# EAGLE board mach hoan chinh (EAGLE 5.10)
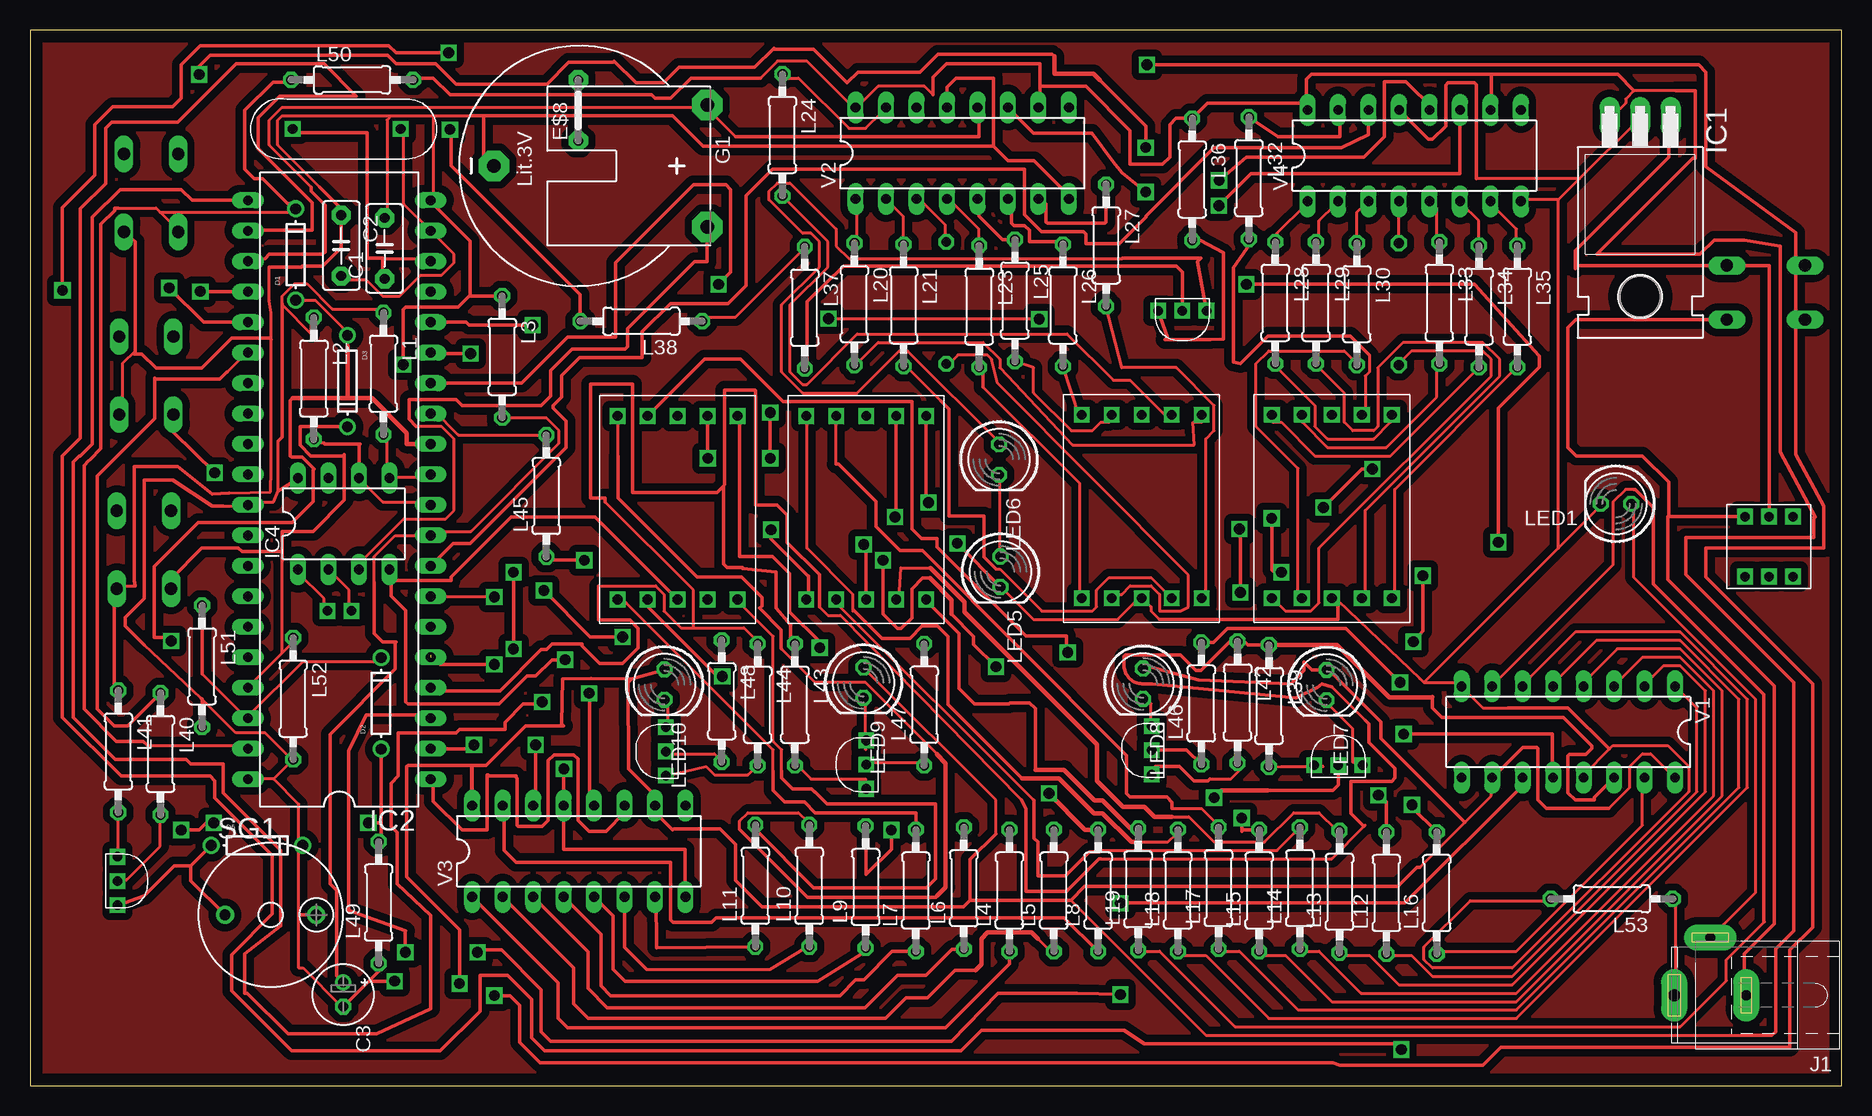
[diagram p0: board, top side]
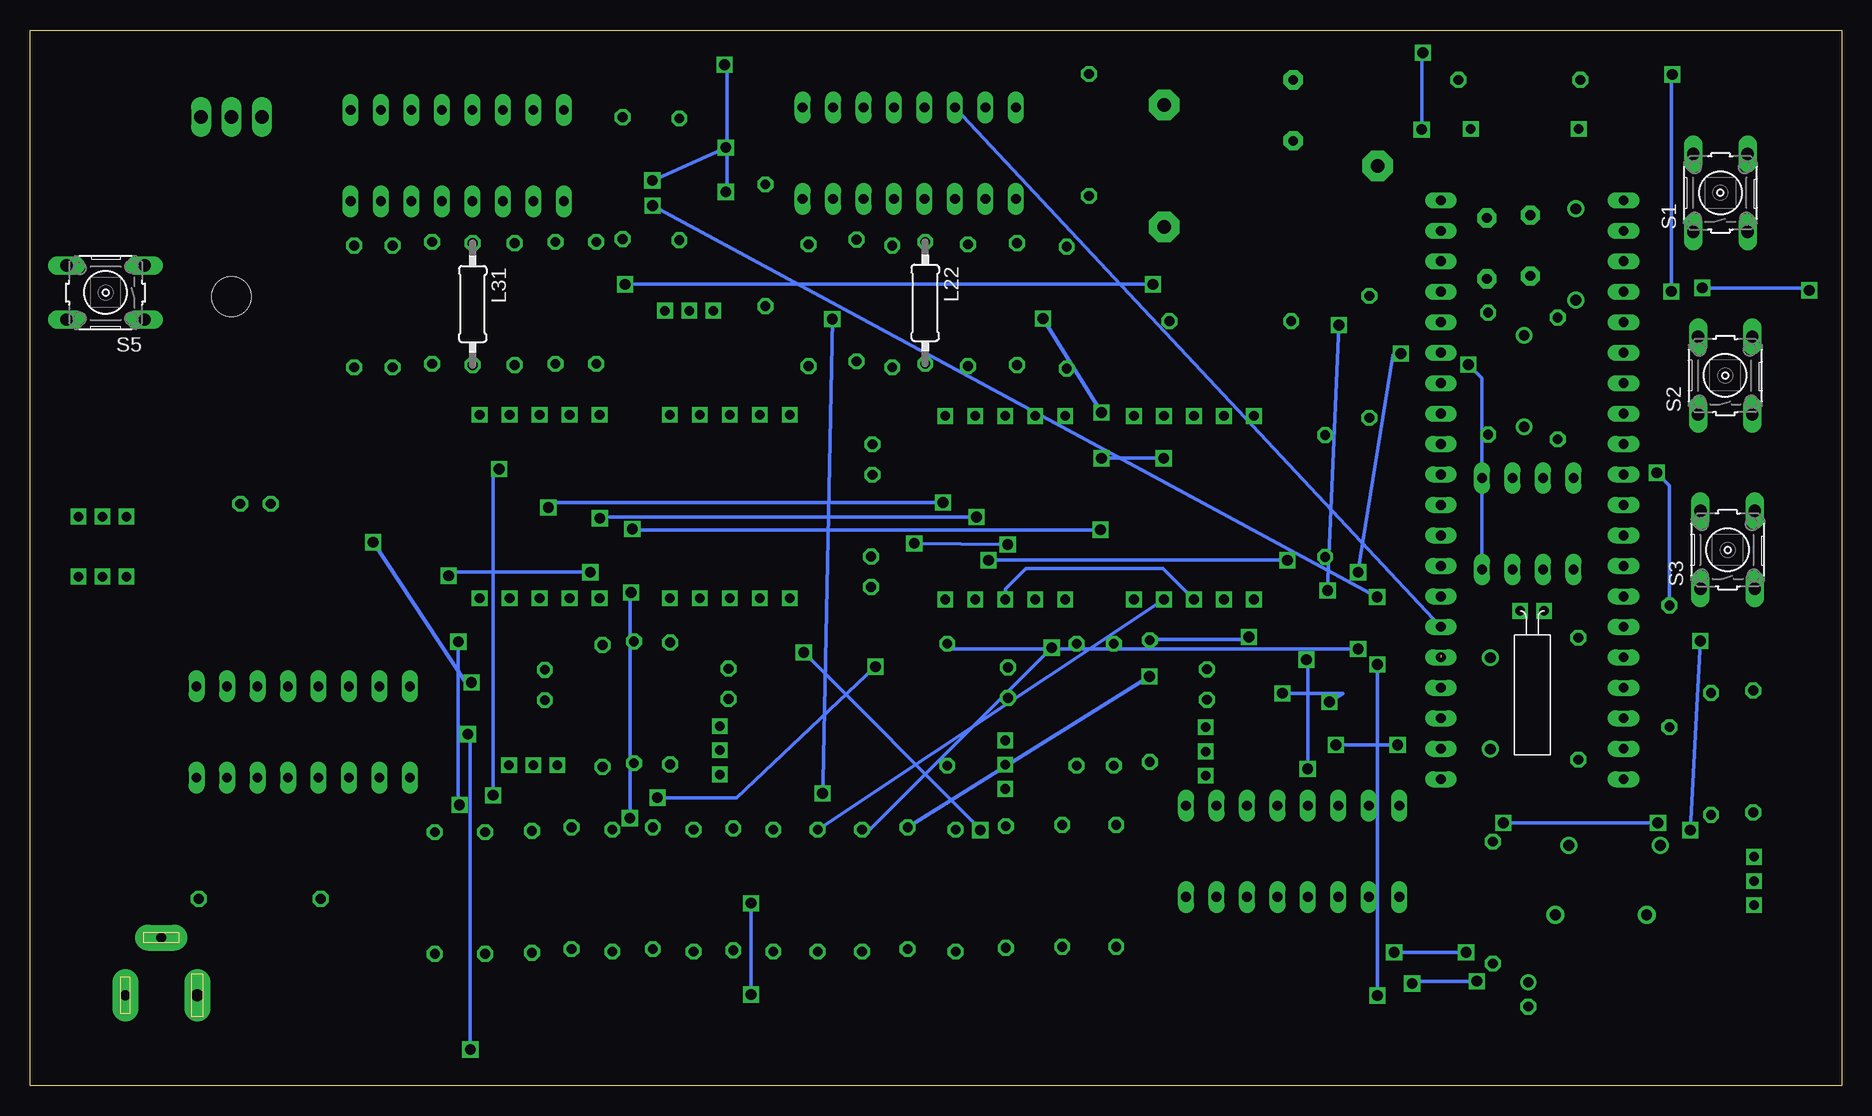
[diagram p1: board, bottom side, seen from below]

Size 151 x 88 mm. Coordinates in mm from the lower left corner, seen from the top.
Outline: 0,0 151,0 151,88 0,88 0,0
Copper layers (1*16): Top 0.035mm / dielectric 1.5mm / Bottom 0.035mm
Design rules "default": minimum track width 10mil, minimum drill 24mil, track to track 8mil, track to pad 8mil, pad to pad 8mil, via to via 8mil, smd to smd 8mil, copper to edge 40mil, drill to drill 8mil, minimum pad ring 10mil, minimum via ring 8mil, stop-mask expansion 4mil, vias tented up to drill 0mil, thermal gap 10mil

## Footprints (pad centres in the part's own frame; a part is rotated, then mirrored left to right if it is on the bottom)
C5B3 = drill 0.813 pad 1.6 octagon: 1 -2.54,0; 2 2.54,0
E2-5 = drill 0.813 pad 1.27 round: + -1.016,0 | drill 0.813 pad 1.27 octagon: - 1.016,0
DO-1N4148 = drill 0.9 round: A -3.81,0; C 3.81,0
05 = drill 0.813 pad 1.6 octagon: 1 -2.54,0; 2 2.54,0
CR2032H = drill 1.118 pad 2.54 octagon: + 5.08,10.795; +@1 -5.08,10.795; - 0,-6.985
TO220H = drill 1.118 long: 1 -2.54,-10.16; 2 0,-10.16; 3 2.54,-10.16 | hole 3.302: 0,4.826
DIL40 = drill 0.813 long: 1 -24.13,-7.62; 2 -21.59,-7.62; 3 -19.05,-7.62; 4 -16.51,-7.62; 5 -13.97,-7.62; 6 -11.43,-7.62; 7 -8.89,-7.62; 8 -6.35,-7.62; 9 -3.81,-7.62; 10 -1.27,-7.62; 11 1.27,-7.62; 12 3.81,-7.62; 13 6.35,-7.62; 14 8.89,-7.62; 15 11.43,-7.62; 16 13.97,-7.62; 17 16.51,-7.62; 18 19.05,-7.62; 19 21.59,-7.62; 20 24.13,-7.62; 21 24.13,7.62; 22 21.59,7.62; 23 19.05,7.62; 24 16.51,7.62; 25 13.97,7.62; 26 11.43,7.62; 27 8.89,7.62; 28 6.35,7.62; 29 3.81,7.62; 30 1.27,7.62; 31 -1.27,7.62; 32 -3.81,7.62; 33 -6.35,7.62; 34 -8.89,7.62; 35 -11.43,7.62; 36 -13.97,7.62; 37 -16.51,7.62; 38 -19.05,7.62; 39 -21.59,7.62; 40 -24.13,7.62
DIL08 = drill 0.813 long: 1 -3.81,-3.81; 2 -1.27,-3.81; 3 1.27,-3.81; 4 3.81,-3.81; 5 3.81,3.81; 6 1.27,3.81; 7 -1.27,3.81; 8 -3.81,3.81
SPC4077 = drill 0.8 pad 2.184 long: 1 -3,0; 2 0,-4.8 | drill 1 pad 2.184 long: 3 3,0
0207/10 = drill 0.813 octagon: 1 -5.08,0; 2 5.08,0
LED5MM = drill 0.813 octagon: A -1.27,0; K 1.27,0
B3F-10XX = drill 1.016 long: 1 -3.251,2.261; 2 3.251,2.261; 3 -3.251,-2.261; 4 3.251,-2.261
BMT1205XH7.5 = drill 0.9 pad 1.5 round: + 3.8,0; - -3.8,0
7SEG13X19 = drill 0.8 square: P$1 11.5,-1.7; P$2 9,-1.7; P$3 6.5,-1.7; P$4 4,-1.7; P$5 1.5,-1.7; P$6 11.5,-17; P$7 9,-17; P$8 6.5,-17; P$9 4,-17; P$10 1.5,-17
XTAL12MHZ = drill 0.8 square: P$1 9.5,-2.5; P$2 0.5,-2.5
XTAL32KHZMINI = drill 0.8 square: P$1 0.5,-12; P$2 2.5,-12
PUSKLOCKBUTTON = drill 0.8 square: P$1 5.04,0; P$2 3.04,0; P$3 1.04,0; P$4 1.04,-5; P$5 3.04,-5; P$6 5.04,-5
C9014 = drill 0.8 square: P$1 0.23,1; P$2 2.25,1; P$3 4.27,1
DIL16 = drill 0.813 long: 1 -8.89,-3.81; 2 -6.35,-3.81; 3 -3.81,-3.81; 4 -1.27,-3.81; 5 1.27,-3.81; 6 3.81,-3.81; 7 6.35,-3.81; 8 8.89,-3.81; 9 8.89,3.81; 10 6.35,3.81; 11 3.81,3.81; 12 1.27,3.81; 13 -1.27,3.81; 14 -3.81,3.81; 15 -6.35,3.81; 16 -8.89,3.81

## Placement (x,y rotation side)
C1  [C5B3]  29.56,69.79 90 top
C2  [C5B3]  25.94,70.03 270 top
C3  [E2-5]  26.11,7.59 270 top
D1  [DO-1N4148]  22.14,69.28 90 top
D2  [DO-1N4148]  29.26,31.86 90 top
D3  [DO-1N4148]  26.46,58.73 270 top
D5  [DO-1N4148]  18.92,20.02 0 top
E$8  [05]  45.7,81.3 90 top
G1  CR2032H  [CR2032H]  45.66,76.66 270 top
IC1  7805T  [TO220H]  134.21,70.6 180 top
IC2  AT89C51-12PC  [DIL40]  25.78,49.67 90 top
IC4  ds1307  [DIL08]  26.15,46.83 0 top
J1  [SPC4077]  140.06,7.52 180 top
L1  [0207/10]  29.46,59.35 270 top
L2  [0207/10]  23.66,58.95 270 top
L3  [0207/10]  39.36,60.75 270 top
L4  [0207/10]  81.64,16.25 90 top
L5  [0207/10]  85.34,16.25 90 top
L6  [0207/10]  77.84,16.45 90 top
L7  [0207/10]  73.84,16.25 90 top
L8  [0207/10]  89.04,16.25 90 top
L9  [0207/10]  69.66,16.55 90 top
L10  [0207/10]  64.96,16.65 90 top
L11  [0207/10]  60.46,16.65 90 top
L12  [0207/10]  113.06,16.05 90 top
L13  [0207/10]  109.16,16.15 90 top
L14  [0207/10]  105.86,16.45 90 top
L15  [0207/10]  102.46,16.25 90 top
L16  [0207/10]  117.26,16.05 90 top
L17  [0207/10]  99.08,16.45 90 top
L18  [0207/10]  95.68,16.25 90 top
L19  [0207/10]  92.38,16.35 90 top
L20  [0207/10]  68.72,65.15 270 top
L21  [0207/10]  72.82,65.05 270 top
L22  [0207/10]  76.38,65.25 270 bottom
L23  [0207/10]  79.12,64.95 270 top
L24  [0207/10]  62.72,79.25 270 top
L25  [0207/10]  82.1,65.45 270 top
L26  [0207/10]  86.1,65.05 270 top
L27  [0207/10]  89.7,70.05 270 top
L28  [0207/10]  103.8,65.25 270 top
L29  [0207/10]  107.2,65.25 270 top
L30  [0207/10]  110.6,65.15 270 top
L31  [0207/10]  114.1,65.15 270 bottom
L32  [0207/10]  101.6,75.65 270 top
L33  [0207/10]  117.48,65.25 270 top
L34  [0207/10]  120.78,64.95 270 top
L35  [0207/10]  123.98,64.95 270 top
L36  [0207/10]  96.88,75.55 270 top
L37  [0207/10]  64.58,64.85 270 top
L38  [0207/10]  50.95,63.72 180 top
L39  [0207/10]  103.28,31.65 270 top
L40  [0207/10]  10.88,27.65 270 top
L41  [0207/10]  7.36,27.85 270 top
L42  [0207/10]  100.66,31.95 270 top
L43  [0207/10]  63.76,31.75 270 top
L44  [0207/10]  60.66,31.75 270 top
L45  [0207/10]  43.04,49.15 90 top
L46  [0207/10]  97.64,31.85 90 top
L47  [0207/10]  74.54,31.75 90 top
L48  [0207/10]  57.66,32.05 270 top
L49  [0207/10]  29.06,15.25 90 top
L50  [0207/10]  26.85,83.84 0 top
L51  [0207/10]  14.34,34.95 270 top
L52  [0207/10]  21.94,32.25 270 top
L53  [0207/10]  131.85,15.56 180 top
LED1  [LED5MM]  132.2,48.5 180 top
LED5  [LED5MM]  80.89,42.83 270 top
LED6  [LED5MM]  80.78,52.19 270 top
LED7  [LED5MM]  108.08,33.39 270 top
LED8  [LED5MM]  92.78,33.49 270 top
LED9  [LED5MM]  69.48,33.59 270 top
LED10  [LED5MM]  52.89,33.43 270 top
S1  [B3F-10XX]  10.09,74.42 90 bottom
S2  [B3F-10XX]  9.69,59.19 90 bottom
S3  [B3F-10XX]  9.49,44.66 90 bottom
S5  [B3F-10XX]  144.7,66.11 180 bottom
SG1  BMT1205XH7.5  [BMT1205XH7.5]  20.05,14.22 0 top
U$1  7SEG13X19  [7SEG13X19]  63.2,57.52 0 top
U$2  7SEG13X19  [7SEG13X19]  86.16,57.62 0 top
U$3  7SEG13X19  [7SEG13X19]  102.02,57.62 0 top
U$4  7SEG13X19  [7SEG13X19]  47.48,57.52 0 top
U$5  XTAL12MHZ  [XTAL12MHZ]  21.4,82.25 0 top
U$6  XTAL32KHZMINI  [XTAL32KHZMINI]  24.29,27.57 180 bottom
U$7  PUSHLOCKBUTON  [PUSKLOCKBUTTON]  141.92,47.43 0 top
U$8  C9014  [C9014]  6.3,19.3 270 top
U$9  C9014  [C9014]  94.5,25.7 90 top
U$10  C9014  [C9014]  106.8,25.7 0 top
U$11  C9014  [C9014]  70.7,24.5 90 top
U$12  C9014  [C9014]  54,25.6 90 top
U$13  C9014  [C9014]  98.3,65.6 180 top
V1  74595N  [DIL16]  128.23,29.47 180 top
V2  74595N  [DIL16]  77.71,77.73 0 top
V3  74595N  [DIL16]  45.75,19.53 0 top
V4  74595N  [DIL16]  115.39,77.53 0 top

## Library data of the parts
C1 C2 = capacitor-wima
C3 = rcl
D1-D3 D5 = microbuilder
E$8 = jumper
G1 = battery
IC1 = linear
IC2 = atmel
IC4 = ic-package
J1 = con-jack
L1-L53 = resistor
LED1 LED5-LED10 = led
S1-S3 S5 = switch-omron
SG1 = buzzer
U$1-U$4 = 7seg13x19
U$5 = xtal12mhz
U$6 = Xtal32khzmini
U$7 = pushlockbutton
U$8-U$13 = C9014
V1-V4 = 74ttl-din

## Nets
N$1: IC2.11 IC4.5 L1.2
N$2: IC2.10 IC4.6 L2.2
N$3: IC4.1 U$6.P$1
N$4: C3.+ IC2.9 L3.2
N$5: G1.+ IC4.3
N$6: IC4.2 U$6.P$2
N$7: C2.2 IC2.19 U$5.P$1
N$8: C1.1 IC2.18 U$5.P$2
N$9: D1.C IC2.39 L50.1 S1.1
N$10: IC2.25 L38.2
N$11: IC2.1 V3.11
N$12: IC2.2 V3.14
N$13: IC2.3 V1.11
N$14: IC2.4 L39.1 L42.1 L43.1 L44.1 V1.14
N$15: IC2.5 V2.11
N$16: L9.2 U$4.P$4
N$17: IC2.6 V2.14
N$18: IC2.7 V4.11
N$19: IC2.8 V4.14
N$20: L4.1 V3.1
N$21: L8.1 V3.15
N$22: L7.2 U$4.P$10
N$23: L9.1 V3.5
N$24: L10.1 V3.6
N$25: L4.2 U$4.P$1
N$26: L11.1 V3.7
N$27: L6.1 V3.3
N$28: L7.1 V3.4
N$29: L5.1 V3.2
N$32: L10.2 U$4.P$5
N$34: L11.2 U$4.P$6
N$35: L37.1 L38.1
N$36: L15.2 U$1.P$10
N$37: L13.1 V1.2
N$38: L14.1 V1.3
N$39: L15.1 V1.4
N$41: L17.1 V1.5
N$42: L18.2 U$1.P$5
N$43: L18.1 V1.6
N$44: L16.1 V1.15
N$45: L16.2 U$1.P$2
N$47: L13.2 U$1.P$7
N$48: L14.2 U$1.P$9
N$51: L19.2 U$1.P$6
N$52: J1.1 S5.1 U$7.P$3
N$53: L37.2 U$13.P$2
N$54: L23.2 U$2.P$10
N$55: L27.1 V2.7
N$56: L25.1 V2.5
N$57: L26.1 V2.6
N$58: L27.2 U$2.P$6
N$59: L23.1 V2.4
N$60: L21.1 V2.2
N$61: L20.1 V2.1
N$62: L24.1 V2.15
N$63: L24.2 U$2.P$2
N$64: L20.2 U$2.P$1
N$65: L21.2 U$2.P$7
N$66: L22.2 U$2.P$9
N$67: L25.2 U$2.P$4
N$68: L26.2 U$2.P$5
N$69: L22.1 V2.3
N$70: L31.2 U$3.P$10
N$71: L35.1 V4.7
N$72: L33.1 V4.5
N$73: L34.1 V4.6
N$74: L30.1 V4.3
N$75: L31.1 V4.4
N$76: L29.1 V4.2
N$77: L28.1 V4.1
N$78: L32.1 V4.15
N$79: L32.2 U$3.P$2
N$80: L28.2 U$3.P$1
N$81: L29.2 U$3.P$7
N$82: L30.2 U$3.P$9
N$83: L33.2 U$3.P$4
N$84: L34.2 U$3.P$5
N$85: L35.2 U$3.P$6
N$86: L36.2 U$13.P$3
N$87: LED6.A U$13.P$1
N$88: LED5.A LED6.K
N$89: IC2.26 L40.1
N$90: L40.2 U$8.P$2
N$91: L45.1 U$10.P$2
N$92: L46.1 U$9.P$2
N$93: L47.1 U$11.P$2
N$94: LED7.K U$10.P$3
N$95: D5.A SG1.- U$8.P$3
N$96: D3.C IC2.37 L52.1 S3.1
N$97: L48.2 U$12.P$2
N$98: LED10.K U$12.P$3
N$99: LED9.K U$11.P$3
N$100: L43.2 U$11.P$1
N$101: LED8.K U$9.P$3
N$102: L42.2 U$9.P$1
N$103: L41.2 U$8.P$1
N$104: L44.2 U$12.P$1
N$105: IC2.13 L45.2
N$106: D1.A D2.A D3.A IC2.12 L49.2
N$107: IC2.14 L46.2
N$108: IC2.15 L47.2
N$109: IC2.16 L48.1
N$110: IC2.21 V3.12
N$111: IC2.22 V1.12
N$112: IC2.23 V2.12
N$113: IC2.24 V4.12
N$114: C1.2 C2.1 G1.- IC1.2 IC2.20 IC4.4 L3.1 L41.1 L53.2 LED1.K LED5.K S1.3 S2.3 S3.3 U$1.P$8 U$2.P$8 U$3.P$8 U$4.P$8 V1.8 V1.13 V2.8 V2.13 V3.8 V3.13 V4.8 V4.13
N$115: J1.3 L53.1
N$116: C3.- D5.C IC1.3 IC2.31 IC2.40 IC4.8 L1.1 L2.1 L36.1 L49.1 L50.2 L51.2 L52.2 LED7.A LED8.A LED9.A LED10.A SG1.+ V1.10 V1.16 V2.10 V2.16 V3.10 V3.16 V4.10 V4.16
N$117: D2.C IC2.38 L51.1 S2.1
N$118: J1.2 LED1.A
N$119: IC1.1 S5.3 U$7.P$2
N$120: L8.2 U$4.P$2
N$121: L6.2 U$4.P$9
N$122: L39.2 U$10.P$1
N$123: L17.2 U$1.P$4
N$124: L5.2 U$4.P$7
N$127: L19.1 V1.7
N$128: L12.1 V1.1
N$129: L12.2 U$1.P$1

## Tracks (layer width: path | path; a pad name or v marks a point on that pad's centre or on a via)
N$1
  Top 0.254: IC2.11 33.25,50.75 30.1,50.75 IC4.5 29.75,50.75 29.75,54.25 L1.2
N$2
  Top 0.254: 24.5,53.55 23.8,53.55 L2.2 | 27.3,50.75 IC4.6 27.65,50.4 29.4,48.65 33.25,48.65 IC2.10
  Top 0.305: 24.5,53.55 24.55,53.5 27.5,53.5 27.42,53.42 IC4.6
N$3
  Top 0.254: U$6.P$1 24.5,39.9 24.5,40.6 22.4,42.7 IC4.1
N$4
  Top 0.254: 28.7,42 28.7,44.1 30.45,45.85 33.25,45.85 IC2.9 33.6,46.2 36.75,46.2 44.1,53.55 44.1,54.6 43.05,55.65 39.55,55.65 L3.2 | C3.+ 26.25,8.75
  Top 0.305: 28.7,42 28.7,37.7 29.4,37 30.5,37 30.45,36.95 30.45,34.72 25.02,29.29 25.02,16.82 25.55,16.28 25.55,9.16 C3.+
N$5
  Top 0.254: 32.2,54.95 34.3,54.95 35.35,53.9 35.35,47.95 34.65,47.25 31.15,47.25 27.65,43.75 27.65,43.05 IC4.3
  Top 0.305: G1.+ 56.45,68.7 55.4,68.7 49.8,63.1 49.8,61.6 49.6,61.4 45.2,61.4 43.4,59.6 43.4,57.5 42.6,56.7 36,56.7 35.5,57.2 31.6,57.2 31.6,55.55 32.2,54.95
N$6
  Top 0.254: U$6.P$2 26.6,39.9 26.6,41.3 IC4.2
N$7
  Top 0.254: U$5.P$1 31.15,79.45 31.15,73.5 33.25,71.4 IC2.19 33.6,71.05 35.35,69.3 35.35,68.6 34.3,67.55 32.55,67.55 30.8,65.8 29.4,65.8 28,67.2 25.55,67.2 C2.2
N$8
  Top 0.254: 22.05,79.45 U$5.P$2 | C1.1 29.4,67.55 29.4,68.95 33.25,68.95 IC2.18
  Top 0.305: 22.05,79.45 28.1,79.45 28.1,69 29.4,69 29.4,68.95
N$9
  Top 0.254: 9.8,28.35 17.85,28.35 IC2.39 | 7.35,73.15 10.5,73.15 10.85,72.8 | 10.85,72.8 12.25,71.4 S1.1 | 21.7,83.65 L50.1 | 10.85,72.8 22.05,72.8 D1.C
  Top 0.305: 21.7,83.65 20.25,83.65 17.9,81.3 17.9,76.4 18.7,75.6 19.4,75.6 21.47,73.53 21.7,73.53 D1.C | 7.35,73.15 7.05,73.15 7.05,72.95 5.9,71.8 5.9,53.1 5,52.2 4.85,52.05 4.5,51.7 4.5,31.4 7.2,28.7 9.45,28.7 9.8,28.35
N$10  (via drill 0.9)
  Top 0.305: L38.2 45.87,65.93 35.1,76.7 35.1,79.6 v35,79.7 | v34.9,86.1 30.5,86.1 29.9,86.7 14.2,86.7 12.6,85.1 12.6,82.3 11.9,81.6 6.9,81.6 5.4,80.1 5.4,75.9 2.7,73.2 v2.7,66.3 | IC2.25 14.46,63.64 v11.6,66.5
  Bottom 0.305: v35,79.7 35,86 v34.9,86.1 | v11.6,66.5 2.9,66.5 v2.7,66.3
N$11
  Top 0.254: IC2.1 33.6,25.2
  Top 0.305: V3.11 49.56,22.76 48,21.2 46.6,21.2 45.7,22.1 45.7,25.1 45.67,25.13 45.67,27.23 45.32,27.58 43.68,27.58 43.2,27.1 43.2,22.1 42.7,21.6 40.7,21.6 40.6,21.7 40.6,25.6 40.5,25.7 40.5,25.8 38.2,25.8 38.2,25.9 38.1,25.9 38.1,21.3 36,21.3 33.6,23.7 33.6,25.34 IC2.1
N$12  (via drill 0.9)  (1 unrouted)
  Top 0.305: v42.14,28.4 42.14,23.54 V3.14 | 37.06,28.4 36.74,28.08 IC2.2
  Bottom 0.305: v42.14,28.4 37.06,28.4
N$13  (via drill 0.9)  (1 unrouted)
  Top 0.305: V1.11 124.42,25.02 114.61,15.21 v90.9,15.21 | v90.9,7.59 87.29,7.7 80.7,7.7 76.8,3.7 43.4,3.7 42.6,4.5 42.6,8 39.3,11.3 37.3,11.3 v37.3,11.1 | IC2.3 33.62,30.62 33.8,30.8 33.5,30.8 33.4,30.9 28,30.9 26.56,27.91 26.56,14.61 31.3,12.9 31.29,12.89 v31.29,11.1
  Bottom 0.305: v31.29,11.1 v37.3,11.1 | v90.9,7.59 v90.9,15.2 v90.9,15.21 91.1,15.21
N$14
  Top 0.254: V1.14 131.95,25.55 | 47.4,41.65 52.15,41.65 52.85,40.95 52.85,39.55 54.25,38.15 55.3,38.15 | 55.3,38.15 59.5,38.15 60.55,37.1 L44.1 | 47.95,48.65 55.3,41.3 55.3,38.15 | L43.1 63.7,37.1 | 111.3,30.45 108.5,33.25 | 111.3,21.7 111.21,21.61 108.5,18.9 89.25,18.9 | 82.65,23.8 67.55,39.2 66.5,39.2 65.8,39.9 | L42.1 101.15,37.1
  Top 0.305: 116.9,32.4 116.9,31.5 117.7,30.7 127.8,30.7 130.2,28.3 130.2,28.1 129.7,27.6 128.3,27.6 128.2,27.5 128.2,24.4 128.8,23.8 130.4,23.8 130.4,24.02 V1.14 | L39.1 101.52,36.73 101.15,37.1 | L42.1 100.17,37.03 100.1,37.1 97.6,34.6 97.2,34.6 95.9,35.9 91.4,35.9 arc90 91.2,35.7 91.2,35 arc90 92.7,33.5 93.5,33.5 105.5,32.3 107.3,33.2 107.7,33.5 108.5,33.25 | L43.1 63.4,37.19 63.4,38.4 62.2,39.8 62.2,42.8 59.4,43.1 59.4,43.2 58.1,43.2 57.8,43.5 57.8,50 | IC2.4 33.66,32.9 39.17,32.9 42.62,36.35 43.05,36.35 43.51,36.8 46.02,36.8 46.02,36.63 47.47,35.18 49.38,35.18 50.7,36.5 50.7,38.1 50,38.8 47.4,38.8 47.4,41.65 | 82.65,23.8 83,23.05 83,16.2 86.4,16.2 89.1,18.9 89.25,18.9 | 57.8,50 57.25,49.45 50.24,49.45 50.24,58.5 46.74,58.5 46.74,48.97 47.95,48.97 47.95,48.65 | 57.8,50 57.9,50.1 57.9,57.7 57.91,57.99 60.43,57.99 60.48,57.94 60.48,48.41 62.28,48.41 63.12,47.57 63.12,45.29 65.81,42.6 65.81,39.91 65.8,39.9 | 111.3,30.45 111.61,30.14 111.61,28.6 113.77,26.44 113.77,25.63 113.51,25.38 110.11,25.38 110.11,22.71 111.21,21.61
  Top 0.381: L39.1 108.94,36.73 113.31,32.36 116.86,32.36 116.9,32.4
N$15  (via drill 0.9)  (1 unrouted)
  Top 0.305: v38.7,7.5 40,7.5 40.8,6.7 40.8,3.6 42.5,1.9 78,1.9 83.5,1.91 108.61,1.91 109.2,1.7 121.1,1.7 122.6,3.2 146.7,3.2 146.7,11.3 148.6,13.2 148.6,33.5 139.7,42.4 139.7,44.8 149.5,44.8 149.5,48.3 147.2,52.6 147.2,71.1 139.7,76.6 139.7,84.5 139.1,85.1 v93.1,85.1 | V2.11 83.66,79.4 88.5,79.4 90.3,77 91,76.1 v93,74.5 | 33.4,35.9 34.2,35.1 v38.7,35.1
  Bottom 0.305: v38.7,7.5 v38.7,35.1 | v93.1,85.1 92.9,84.9 92.9,74.4 v93,74.5
N$16  (via drill 0.9)
  Top 0.305: v71.8,21.3 71.8,19.7 69.7,17.6 69.7,21.59 L9.2 | v86.5,36.1 86.4,36.2 86.4,37.5 83,37.5 75.6,44.9 75.6,45.6 74.3,45.6 73.5,46.4 73.5,57.03 62.78,57.03 59.23,60.58 56.24,60.58 U$4.P$4
  Bottom 0.305: v71.8,21.3 71.8,21.4 v86.5,36.1
N$17
  Bottom 0.305: IC2.6 V2.14
N$18  (via drill 0.9)
  Top 0.305: V4.11 119.2,76.02 101.78,76.02 v99.11,73.36 | IC2.7 v38.71,40.74
  Bottom 0.305: v38.71,40.74 v99.11,73.36
N$19
  Top 0.305: V4.14 111.58,79.28 109.3,78.2 98.7,78.2 93,72.5 93,72.4 90.8,70.2 88,70.2 88,71 87.8,71.2 84.3,71.2 82.9,72.6 82.9,76.4 61.9,76.4 59.7,74.2 59.7,66.7 58.2,65.2 53.4,65.2 51.04,62.84 51.04,60.7 45.8,60.7 44.3,59.2 44.3,57.4 43.6,56.7 43.6,56.5 44.7,55.4 44.7,53.2 36.7,45.2 35.28,45.2 IC2.8
N$20
  Top 0.254: L4.1 81.55,10.85
  Top 0.305: V3.1 44,8.58 44,5.6 44.8,4.8 76.3,4.8 81.64,10.14 L4.1
N$21
  Top 0.305: V3.15 39.5,23.24 39.5,19.6 40.5,18.6 53.4,18.6 53.4,13.8 53.6,13.6 56.8,13.6 57.2,14 86.2,14 L8.1
N$22
  Top 0.254: 61.95,26.25 61.95,28 49.7,40.25 49,40.25 U$4.P$10 | L7.2 73.5,21.35
  Top 0.305: L7.2 73.84,22.75 65.45,22.75 64.55,23.65 62.89,23.65 61.95,24.59 61.95,26.25
N$23
  Top 0.254: 65.65,8.7 69.65,11.2 L9.1
  Top 0.305: V3.5 48.6,14.14 48.6,9.7 49.6,8.7 65.65,8.7
N$24
  Top 0.254: 51.4,9.7 61.7,9.7 64.75,11.55 L10.1
  Top 0.305: V3.6 49.56,11.54 51.4,9.7
N$25  (via drill 0.9)
  Top 0.254: 59.15,55.3 U$4.P$1 | L4.2 81.55,21.35
  Top 0.305: 59.15,55.3 59.15,44.1 61.9,44.1 63.3,42.7 63.3,39.5 65.84,36.96 v65.84,36.5
  Bottom 0.305: v65.84,36.5 81.01,21.33 L4.2
N$26
  Top 0.254: L11.1 60.2,11.55
  Top 0.305: V3.7 52.2,15.75 52.22,11.47 L11.1
N$27
  Top 0.254: L6.1 77.7,11.2
  Top 0.305: V3.3 46.5,11.16 46.5,8.1 48.1,6.5 69.6,6.5 72.3,9.2 74.7,9.2 76.87,11.37 L6.1
N$28
  Top 0.254: L7.1 73.5,10.85
  Top 0.305: V3.4 47.6,12.6 47.6,8.3 48.4,7.5 67.5,7.5 68.8,8.8 69.5,8.8 71.87,11.17 L7.1
N$29
  Top 0.254: 84,12.25 85.05,11.2 L5.1
  Top 0.305: V3.2 45.3,9.82 45.3,6.8 46.5,5.6 71.3,5.6 73,7.3 74.8,7.3 77.1,9.6 78.8,9.6
  Top 0.381: 78.8,9.6 79.3,10.1 79.3,12.24 79.81,12.75 83.5,12.75 84,12.25
N$30
  pour Top (isolate 0.61): 0,88.01 150.98,88.01 150.98,-0.03 0,-0.03
N$32
  Top 0.254: 49,52.5 49,55.3 U$4.P$5 | 62.65,36.4 65.45,33.6 69.65,33.6 75.6,27.65 | 59.15,21.35 59.15,22.05 59.85,22.75 64.05,22.75 64.75,22.05 L10.2
  Top 0.305: 49,52.5 49,49 55.6,42.4 59.3,42.4 61,40.7 61,40 60.8,39.8 62.6,38 62.6,36.45 62.65,36.4 | 59.15,21.35 64.8,15.7 75.5,15.7 75.6,15.8
  Top 0.381: 75.6,27.65 75.6,27.6 76.33,26.87 76.33,16.53 75.6,15.8
N$34
  Top 0.254: 62.65,26.25 62.65,28 61.95,28.7 61.95,37.45 59.15,40.25 U$4.P$6 | L11.2 60.55,21.7
  Top 0.305: L11.2 60.46,21.34 65.3,16.5 74.8,16.5 74.8,16.56 75.46,17.22 75.46,23.5 75.44,23.47 66.45,23.47 65.43,24.49 65.38,24.49 65.13,24.74 63.55,24.74 62.65,25.64 62.65,26.25
N$35
  Top 0.254: L38.1 56.35,64.05 58.8,64.05 64.4,69.65 L37.1
N$36  (via drill 0.9)
  Top 0.305: L15.2 101.13,21.33 101,21.2 v101,22.3 | v100.9,41.1 100.9,46.3 v100.8,46.4 | 64.9,42.44 64.9,40.72 U$1.P$10 | 64.9,42.44 64.9,42.5 | v61.76,46.33 61.76,45.58 64.9,42.44
  Bottom 0.305: v101,22.3 101,41 v100.9,41.1 | v100.8,46.4 100.72,46.33 v61.76,46.33
N$37
  Top 0.254: L13.1 109.2,10.85 111.65,10.85 114.1,8.4 123.55,8.4 139.65,24.5 139.65,32.9 137.55,35 136.15,35 134.75,33.6 V1.2
N$38
  Top 0.254: L14.1 106.05,11.2 107.45,11.2 110.95,7.7 123.9,7.7 140.35,24.15 140.35,32.9 137.55,35.7 134.4,35.7 132.3,33.6 V1.3
N$39
  Top 0.254: L15.1 102.55,10.85 104.65,10.85 108.5,7 123.9,7 141.05,24.15 141.05,32.9 137.55,36.4 132.3,36.4 129.5,33.6 V1.4
N$41
  Top 0.254: L17.1 99.4,11.2 100.8,11.2 105.7,6.3 123.9,6.3 142.45,24.85 142.45,32.2 137.55,37.1 130.55,37.1 127.05,33.6 V1.5
N$42
  Top 0.254: L18.2 95.55,21 94.85,20.3 92.05,20.3 | U$1.P$5 64.75,55.3 64.75,44.8 68.6,40.95 68.6,39.7 68.6,39.55
  Top 0.305: 68.6,39.7 71.01,37.29 73.36,37.29 74.37,38.3 75.67,38.3 76.53,37.44 76.53,31.77 82.7,25.6
  Top 0.381: 82.7,25.6 85.78,25.6 88.67,22.71 89.41,22.71 91.82,20.3 92.05,20.3
N$43
  Top 0.254: V1.6 124.6,33.6 128.8,37.8 137.55,37.8 143.15,32.2 143.15,24.85 123.9,5.6 103.25,5.6 98,10.85 95.9,10.85 L18.1
N$44
  Top 0.254: L16.1 117.6,11.2 123.9,11.2 134.4,21.7 134.4,25.55 V1.15
N$45  (via drill 0.9)
  Top 0.305: L16.2 115.2,23.19 v115.2,23.4 | v115.3,37 116.1,37.9 v116.1,42.5 | v104.3,42.8 104.2,42.9 103.6,42.9 103.5,43 v103.5,47.3 | U$1.P$2 72.2,47.9 72.4,47.7 v72.1,47.4
  Bottom 0.305: v115.2,23.4 115.3,23.5 v115.3,37 | v116.1,42.5 115.8,42.8 v104.3,42.8 | v103.5,47.3 103.6,47.2 103.6,47.1 103.3,47.4 v72.1,47.4
N$47
  Top 0.254: L13.2 108.85,21.35 107.45,22.75 105.35,22.75 102.9,20.3 98.7,20.3 96.6,22.4 95.2,22.4 | 75.05,43.15 72.6,43.15 72.45,40.6 U$1.P$7
  Top 0.381: 75.05,43.15 77.88,40.32 77.88,39.47 88.92,28.42 88.92,25.4 91.08,23.24 92.89,23.24 93.73,22.4 95.2,22.4
N$48
  Top 0.254: L14.2 105.7,21.35 103.95,19.6 89.25,19.6 | U$1.P$9 67.2,40.25 83.65,23.8
  Top 0.305: 89.25,19.6 89.15,19.5 88.3,19.5 86.3,17.5 84,17.5 84,20.29 83.67,20.62 83.67,23.78 83.65,23.8
N$51
  Top 0.254: 74.9,40.25 U$1.P$6 | L19.2 92.05,21.7
  Top 0.305: 74.9,40.25 77.44,37.7 77.44,33.1 78.72,31.83 81.61,31.83 81.69,31.9 83.31,31.9 83.8,31.42 83.8,26.31
  Top 0.381: 83.8,26.31 86.21,26.31 88.75,23.77 89.38,23.77 91.73,21.43 L19.2
N$52
  Top 0.254: 142.8,47.6 U$7.P$3 143.15,47.25 | J1.1 143.15,7.7
  Top 0.305: J1.1 142.7,7.16 142.7,7.1 142.9,7.3 142.9,11 145.4,13.5 145.4,33.3 136.5,42.2 136.5,47.43 | 136.5,47.43 U$7.P$3 | S5.1 128.85,63.85 128.2,63.2 128.2,53.2 128.9,52.5 134.4,52.5 136.6,50.3 136.6,47.53 136.5,47.43
N$53
  Top 0.254: L37.2 64.75,59.85
  Top 0.305: 64.75,59.85 64.75,65.35 67.8,68.3 95.55,68.3 96.05,67.8 U$13.P$2
N$54
  Top 0.254: 79.45,58.25 87.5,50.2 87.5,40.95 U$2.P$10
  Top 0.305: L23.2 79.45,59.54 79.45,58.25
N$55
  Top 0.305: L27.1 89.7,72 89.6,71.9 84.8,71.9 84.7,72 84.7,73.5 84.35,73.85 84.13,73.85 V2.7
N$56
  Top 0.254: V2.5 79.1,73.85
  Top 0.305: L25.1 81.07,70.53 79.1,72.5 79.1,73.8 V2.5
N$57
  Top 0.254: V2.6 81.55,73.85
  Top 0.305: L26.1 85.88,70.35 83.3,70.35 83.3,71.3 82.9,71.7 82,71.7 81.8,71.9 81.8,73.64 V2.6
N$58
  Top 0.254: U$2.P$6 98,40.95 98,53.9 98.7,54.6 98.7,56.7 95.55,59.85 91,59.85 L27.2
N$59
  Top 0.254: L23.1 79.1,70.35 79.1,71.4 76.65,73.85 V2.4
N$60
  Top 0.254: L21.1 72.8,70.35 72.8,72.45 71.4,73.85 V2.2
N$61
  Top 0.254: L20.1 68.95,70.35 68.95,73.85 V2.1
N$62
  Top 0.254: L24.1 63,84 64.05,84 68.25,79.8 69.65,79.8 71.05,81.2 V2.15
N$63
  Top 0.254: U$2.P$2 94.85,55.65 91.7,58.8 90.3,58.8 86.45,62.65 68.95,62.65 64.75,58.45 64.4,58.45 63.35,59.5 63.35,65.1 66.5,68.25 66.5,70.35 63,73.85 L24.2
N$64
  Top 0.254: U$2.P$1 97.65,55.3 96.95,55.3 97.05,53.4 86.9,53.4 80.85,59.85 80.85,60.55 79.45,61.95 70.7,61.95 68.95,60.2 L20.2
N$65
  Top 0.254: 80.5,43.05 80.85,43.05 84.35,39.55 88.55,39.55 88.9,39.9 88.9,41.3 89.95,42.35 93.45,42.35 94.85,40.95 U$2.P$7 | 75.95,57.05 73.15,59.85 L21.2
  Top 0.305: 80.5,43.05 79.5,44.05 79.5,47.5 76.6,47.5 76.6,56.4 75.95,57.05
N$66
  Top 0.254: U$2.P$9 90.3,40.95 91,40.95 91.7,41.65 93.45,41.65 94.15,40.95 94.15,39.55 95.9,39.55 96.55,39.9 96.55,42.55 80.65,58.55 80.15,60.55 79.8,60.9 77.35,60.9 76.65,60.2 L22.2
N$67
  Top 0.254: U$2.P$4 89.95,55.3 89.25,55.3 88.55,54.6 86.8,54.6 83.65,57.75 83.65,59.85 L25.2
N$68
  Top 0.254: U$2.P$5 87.5,55.65 L26.2
N$69
  Top 0.254: L22.1 76.3,70.35 76.3,71.75 74.2,73.85 V2.3
N$70
  Top 0.254: U$3.P$10 103.6,40.6 104.65,39.55 106.75,39.55 107.45,40.25 107.45,44.8 121.8,59.15 121.8,60.55 121.1,61.25 115.15,61.25 114.1,60.2 L31.2
N$71
  Top 0.254: L35.1 123.9,70.35 123.9,71.4 121.8,73.5 V4.7
N$72
  Top 0.254: L33.1 117.25,70.35 117.25,73.15 116.9,73.5 V4.5
N$73
  Top 0.254: L34.1 120.75,70.35 120.75,72.1 119.35,73.5 V4.6
N$74
  Top 0.254: L30.1 110.6,72.8 111.3,73.5 V4.3
N$75
  Top 0.254: L31.1 114.1,73.5 V4.4
N$76
  Top 0.254: L29.1 107.45,70.35 107.45,72.1 108.85,73.5 V4.2
N$77
  Top 0.254: L28.1 103.95,70.35 103.95,71.05 106.4,73.5 V4.1
N$78
  Top 0.254: V4.15 109.2,81.55
  Top 0.305: V4.15 109.2,81.18 109.2,79.1 104.03,79.1 L32.1
N$79
  Top 0.254: 111.65,60.9 111.65,59.5 111.3,59.15 111.3,55.65 U$3.P$2
  Top 0.305: L32.2 101.98,70.57 100.31,68.19 100.31,60.3 100.9,60.2 103.2,62.5 110.05,62.5 111.65,60.9
N$80
  Top 0.254: U$3.P$1 113.4,55.3 112,53.9 108.15,53.9 107.1,54.95 107.1,56.7 103.95,59.85 L28.2
N$81
  Top 0.254: U$3.P$7 111.3,40.95 111.3,47.95 122.5,59.15 122.5,60.55 121.1,61.95 114.45,61.95 112.35,59.85 112.35,54.95 112,54.6 110.25,54.6 109.55,55.3 109.55,57.75 107.45,59.85 L29.2
N$82
  Top 0.254: U$3.P$9 105.7,40.95 105.7,51.45 102.2,54.95 102.2,60.2 103.25,61.25 109.55,61.25 110.6,60.2 L30.2
N$83
  Top 0.254: U$3.P$4 106.05,55.3 108.15,53.2 113.05,53.2 117.25,57.4 117.25,59.85 L33.2
N$84
  Top 0.254: U$3.P$5 103.6,55.3 104.3,55.3 107.1,52.5 113.4,52.5 120.75,59.85 L34.2
N$85
  Top 0.254: U$3.P$6 113.75,40.95 113.75,49.7 123.9,59.85 L35.2
N$86
  Top 0.305: L36.2 97.53,70.47 99.47,69.42 99.47,62.22 98.4,62.2 94.6,62.2 94.8,62.4 U$13.P$3
N$87
  Top 0.254: 91,68.95 68.25,68.95 67.2,70 67.2,71.4 63.35,75.25 62.3,75.25 61.6,74.55 61.6,73.85 64.4,71.05 65.1,71.05 65.8,70.35 65.8,68.25 62.65,65.1 62.65,59.5 64.4,57.75 68.95,57.75 72.45,61.25 73.15,61.25 80.85,53.55 LED6.A
  Top 0.305: 91,68.95 91.05,69 97.6,69 97.3,68.7 U$13.P$1
N$88
  Top 0.254: LED5.A 80.85,44.1 80.85,50.75 LED6.K
N$89
  Top 0.254: 16.45,59.5 17.85,60.9 IC2.26 | L40.1 10.85,32.55
  Top 0.305: L40.1 8.15,30 7,30 5.6,31.4 5.6,50.8 10.4,55.6 10.4,59 10.5,58.9 15.8,58.9 16.4,59.5 16.45,59.5
N$90
  Top 0.254: U$8.P$2 7.35,17.15 8.05,17.15 10.85,19.95 10.85,22.4 L40.2
N$91  (via drill 0.9)
  Top 0.305: U$10.P$2 109.05,25.05 108.6,24.6 103.2,24.6 | 75,42.3 74.4,42.3 73.5,41.4 73.5,39 72.6,38.1 72.3,38.1 71.1,39.3 v71.1,43.8 | v46.2,43.8 43.31,43.8 L45.1 | 76.81,39.29 78.66,37.44 78.66,36.78 v80.52,34.92
  Top 0.381: 75,42.3 76.81,40.49 76.81,39.29 | 103.2,24.6 99.3,24.6 v98.7,24
  Bottom 0.305: v98.7,24 92.1,24 v80.52,34.92 | v46.2,43.8 v71.1,43.8
N$92
  Top 0.254: U$9.P$2 93.8,28
  Top 0.305: 93.8,28 96.41,28 L46.1
N$93
  Top 0.254: U$11.P$2 70,26.95 74.2,26.95 L47.1
N$94
  Top 0.254: U$10.P$3 110.25,26.95 110.25,29.75 108.15,31.85 LED7.K
N$95
  Top 0.254: D5.A 15.05,19.95
  Top 0.305: U$8.P$3 9.5,15.8 12,18.3 13.39,18.3 | 13.39,18.3 D5.A | 13.39,18.3 13.39,17.08 SG1.-
N$96
  Top 0.254: 21,36.05 22.05,37.1 L52.1 | 21,36.05 18.2,33.25 IC2.37 | 21,36.05 21,43.75 | S3.1 11.9,41.65
  Top 0.305: S3.1 11.75,42.23 14.33,44.81 17.37,44.81 17.68,44.5 21,44.5 | 21,43.75 21,44.5 | 21,44.5 21,46.2 23.6,46.2 26.2,48.8 26.2,52.6 26.1,52.5 23.4,52.5 22.5,53.4 22.5,54.92 D3.C
N$97
  Top 0.254: U$12.P$2 53.2,27.65 57.05,27.65 57.4,27.3 L48.2
N$98
  Top 0.254: U$12.P$3 53.2,29.4 53.2,31.85 LED10.K
N$99
  Top 0.254: U$11.P$3 69.65,28 69.65,32.2 LED9.K
N$100
  Top 0.254: U$11.P$1 69.65,25.55 65.1,25.55 64.05,26.6 L43.2
N$101
  Top 0.254: U$9.P$3 93.45,29.4 93.45,31.85 93.1,32.2 LED8.K
N$102
  Top 0.254: 98.35,25.55 100.1,25.55 101.15,26.6 L42.2 | U$9.P$1 93.8,26.6
  Top 0.305: 93.8,26.6 95.8,26.6 97,25.4 98.2,25.4 98.35,25.55
N$103
  Top 0.254: U$8.P$1 7.35,18.55 7.35,22.75 L41.2
N$104
  Top 0.254: U$12.P$1 56.35,26.6 57.05,25.9 59.85,25.9 60.55,26.6 L44.2
N$105
  Top 0.254: L45.2 42.7,54.25 35.7,54.25 33.6,56.35 IC2.13
N$106  (via drill 0.9)
  Top 0.254: IC2.12 33.25,53.55 | D1.A 22.4,65.45 23.8,65.45 26.6,62.65 D3.A | D2.A 29.4,28
  Top 0.305: 29.26,21.9 29.26,20.53 L49.2 | 29.26,21.9 D2.A | 26.46,61.64 D3.A | 21.9,57.3 21.7,57.1 21.7,52.5 21.8,52.4 22.7,52.4 23.7,51.4 23.6,51.3 23.6,48.7 21.84,46.94 14.02,46.94 10.36,43.28 10.36,37.34 11.5,37.34 v11.76,37.07 | v12.6,21.3 14.1,21.3 14.7,21.9 v15.3,21.9 | v28.2,21.9 29.26,21.9
  Top 0.381: 21.9,57.3 26.46,57.3 | IC2.12 31.39,53.48 31.39,54.41 28.5,57.3 26.46,57.3 | 26.46,57.3 26.46,61.64
  Bottom 0.305: v12.6,21.3 v11.76,37.07 | v15.3,21.9 v28.2,21.9
N$107  (via drill 0.9)
  Top 0.305: 97.61,36.9 L46.2 98.63,36.93 99.8,38.1 109.7,38.1 v114.2,33.6 | IC2.14 40.96,58.56 44.8,62.4 48.8,62.4 48.8,68.6 55.3,75.1 58,75.1 58.4,74.7 58.4,67.8 v57.4,66.8 | v122.4,45.3 122.4,56.5 125.8,59.9 125.8,60.8 120.4,66.8 v101.4,66.8
  Bottom 0.305: v114.2,33.6 114.7,33.6 v122.4,45.3 | v57.4,66.8 v101.4,66.8
N$108  (via drill 0.9)
  Top 0.305: v40.3,36.4 v40.3,42.8 | L47.2 74.54,36.3 | v36.74,61.03 33.47,61.03 IC2.15
  Bottom 0.305: v36.74,61.03 37.4,60.9 v40.3,42.8 | v40.3,36.4 74.11,36.4 arc90 L47.2
N$109  (via drill 0.9)
  Top 0.305: IC2.16 36.36,63.64 36.6,63.4 v41.9,63.4 | 49.3,37.5 v49.4,37.4 46.7,37.4 v42.84,41.26
  Bottom 0.305: v42.84,41.26 v41.9,63.4 | v49.4,37.4 49.6,37.2 57.59,37.2 L48.1
N$110  (via drill 0.9)  (1 unrouted)
  Top 0.305: IC2.21 13.5,73.8 12.6,74.7 7.5,74.7 5.2,72.4 5.2,53.5 4.2,52.5 4.1,52.5 3.6,52 3.6,30.7 7.1,27.2 13,27.2 13.4,26.8 16.1,26.8 16.1,24.4 20.9,19.6 20.9,13.3 17.9,11 17.9,7.7 18.1,7.7 21.5,4.3 28.9,4.3 33.4,6.4 33.4,14.2 30.6,16.8 30.6,21.1 30.1,21.6 30.1,25.2 30.7,25.8 30.7,29.4 35.5,29.4 35.8,29.7 39.6,29.7 39.6,30.28 41.12,31.8 42.5,31.8 v42.68,31.97 | 46.64,32.7 46.64,23.72 V3.12
  Bottom 0.305: v42.68,31.97 41.56,32.7 v46.6,32.7 46.64,32.7
N$111  (via drill 0.9)
  Top 0.305: IC2.22 18.2,71.3 23.5,71.3 23.5,73.6 19,78.1 19,80.7 20.8,82.5 27.2,82.5 24.5,85.2 17.2,85.2 12.3,80.3 6.8,80.3 6.3,79.8 6.3,75.2 4.2,73.1 4.2,54 2.7,52.5 2.7,30.7 7.6,25.8 15,25.8 15.4,25.4 15.4,24 20.2,19.2 20.2,14.3 16.8,10.9 16.8,7.9 21.8,2.9 34.2,2.9 37.5,6.2 37.5,9.2 39.8,9.2 41.8,7.2 41.8,4 42.9,2.9 77.6,2.9 79.3,4.6 91.2,4.6 92.9,3.5 113.8,3.5 v114.3,3 114.2,3.1 114,3.1 113.8,2.9 | V1.12 126.9,25.72 126.9,29.3 v114.5,29.3
  Bottom 0.305: v114.5,29.3 114.3,29.1 v114.3,3
N$112
  Top 0.254: 19.6,68.95 18.2,68.95 IC2.23 | 23.45,74.9 19.95,78.4 19.95,80.5 21,81.55 56.35,81.55 58.8,79.1 | 79.1,81.55 V2.12
  Top 0.305: 19.6,68.95 19.95,69.3 24.4,69.3 24.6,69.5 24.6,73.4 23.45,74.55 23.45,74.9 | 79.1,81.55 79.1,79.1 58.8,79.1
N$113  (via drill 0.9)
  Top 0.305: V4.12 116.72,81.4 117,81.4 114.7,83.7 112.9,83.7 112.9,79.1 111.2,77.4 101.4,77.4 v99.12,75.46 | IC2.24 14.22,66.18 v14.2,66.2 | v14.1,84.3 14.1,85 15,85.9 29.8,85.9 30.5,85.2 33.8,85.2 35.5,83.5 43.1,83.5 44.9,85.3 48.6,85.3 48.7,85.4 50.5,83.6 52.8,83.6 54.1,84.9 60.4,84.9 62,86.5 62,86.4 65.3,86.4 68.1,83.6 69,84.5 74.2,84.5 75.7,86 85.2,86 85.4,85.8 | 89.2,83.8 93,80 v93,78.2
  Top 0.381: 85.4,85.8 85.4,84.35 88.65,84.35 89.2,83.8
  Bottom 0.305: v93,78.2 v99.12,75.46 | v14.2,66.2 14.2,84.2 v14.1,84.3
N$114  (via drill 0.9)
  Top 0.254: L53.2 126.7,15.4 120.05,15.4 116.2,11.55 116.2,10.5 116.9,9.8 123.55,9.8 138.25,24.5 138.25,26.6 136.5,28.35 131.95,28.35 131.65,28.05 129.5,25.9 V1.13 | V4.13 114.45,81.2 | 123.2,31.5 121.1,31.5 119.35,33.25 V1.8 119,33.6 116.2,33.6 | IC1.2 134.05,80.5 129.15,75.6 | 129.15,75.6 120.55,75.6 | V4.8 124.6,73.85 127.4,73.85 | 127.4,73.85 129.15,75.6 | LED1.K 130.9,48.3 127.4,44.8 | 127.4,44.8 127.4,73.85 | 116.2,33.6 127.4,44.8 | U$3.P$8 108.85,40.6 109.03,40.42 115.85,33.93 116.2,33.6 | 94.15,38.85 93.45,39.55 93.45,39.9 92.75,40.6 U$2.P$8 92.4,40.6 90.65,38.85 83.65,38.85 81.2,41.3 LED5.K | L3.1 39.2,66.15 | 33.6,73.5 IC2.20 33.6,73.85 33.6,80.85 | C1.2 29.75,72.45 29.75,80.5 30.1,80.85 | 33.6,80.85 36.75,80.85 | 30.1,80.85 33.6,80.85 | 30.1,80.85 21,80.85 20.65,80.5 20.65,78.4 24.15,74.9 | S2.3 7.7,56 7.7,60.2 8.75,61.25 8.75,70.35 8.05,71.05 S1.3 | 19.95,68.25 19.95,65.45 20.1,64.4 20.1,62.2 20.1,51.45 20.05,49.5 16.6,49.4 | 8.75,41.65 7.35,41.65 S3.3 7,41.3 | L41.1 7.35,33.25
  Top 0.305: V4.13 116.56,78.9 116.9,78.9 118,80 118,83.4 118.2,83.6 120.4,83.6 120.55,83.45 120.55,75.6 | 131.65,28.05 128.2,31.5 123.2,31.5 | 109.03,40.42 109.03,38.85 94.15,38.85 | v77.3,45.2 LED5.K | v69.5,45.1 69.7,44.9 U$1.P$8 | V3.8 54.6,15.72 54.6,19.7 44.48,19.7 V3.13 44.48,26.38 v44.5,26.4 | U$4.P$8 47.1,47.4 40.1,47.4 35.1,42.4 35.1,42.1 30.3,42.1 30.1,42.3 | 30.1,42.3 30.1,40.8 31.3,39.6 31.3,32 31.5,31.8 38.3,31.8 38.33,31.83 39.12,31.83 41.43,34.14 42.16,34.14 43.53,35.5 v44.6,35.5 | 30.1,42.3 29.96,42.44 IC4.4 | V2.8 86.6,74.2 83.7,77.1 81.5,77.1 80.3,78.3 | V2.13 76.44,83.24 77.2,84 80.3,84 80.3,78.3 | v31.1,60.1 31.1,64.7 31.3,64.9 35.7,64.9 36.7,65.9 | 36.7,65.9 36.7,65.8 36.73,65.83 L3.1 36.77,65.83 36.7,65.9 | 80.3,78.3 56.1,78.3 53.55,80.85 37.8,80.85 | 36.7,65.9 36.7,70.4 33.6,73.5 | G1.- 37.8,77.53 37.8,80.85 | 36.75,80.85 37.8,80.85 | 24.15,74.9 25.94,73.11 C2.1 25.94,69.84 24.4,68.3 22.7,68.3 22.65,68.25 19.95,68.25 | 8.75,70.35 8.75,61.05 8.7,61 9.3,61 10.5,59.8 14.3,59.8 16.8,62.3 20,62.3 20.1,62.2 | 16.6,49.4 15.2,49.3 12.3,51.6 8.7,51.6 8.7,42.1 8.75,41.65 | 7,41.3 7,33.29 L41.1
  Bottom 0.305: v69.5,45.1 v77.3,45.2 | U$1.P$8 69.7,41.4 68,43.1 56.56,43.1 U$4.P$8 | v44.5,26.4 44.5,35.5 v44.6,35.5 | IC4.4 29.96,58.96 v31.1,60.1
N$115
  Top 0.254: L53.1 137.2,15.4 137.2,7.7 J1.3
N$116  (via drill 0.9)
  Top 0.254: 32.2,84 L50.2 | 60.9,84 62.3,85.4 64.75,85.4 68.6,81.55 V2.16 68.95,81.55 70.7,83.3 74.55,83.3 75.25,82.6 | 106.75,81.55 V4.16 106.4,81.55 | 131.6,80.5 IC1.3 131.95,80.85 133,81.9 133,82.25 133.7,82.95 137.2,82.95 | 121.8,81.2 V4.10 | V1.16 136.85,25.9 135.1,27.65 134.4,27.65 133.35,26.6 133.35,24.85 131.6,23.1 | 93.1,35 LED8.A | 107.8,35 LED7.A 108.15,34.65 | V1.10 121.8,25.55 121.8,24.15 119.59,21.94 115.85,18.2 | LED9.A 69.65,34.65 80.5,23.8 80.5,21 | 143.15,4.2 98,4.2 86.75,15.45 | V3.10 52.07,22.8 | L1.1 29.4,64.75 25.2,64.75 23.1,66.85 22.05,66.85 21,65.8 21,65.2 21,65.1 23.45,62.65 23.45,63.7 L2.1 | 20.7,49.55 22.05,50.4 IC4.8 20.7,49.55 | 20.7,49.55 20.7,53.75 | 52.85,34.65 LED10.A | 20.7,49.55 20.3,48.65 18.2,48.65 IC2.31 17.85,48.3 16.1,48.3 | 9.5,36.75 14.28,32.27 17.15,29.4 19.6,29.4 21.7,27.3 L52.2 21.7,26.95 20.3,25.55 | IC2.40 18.2,25.55 20.3,25.55 | 20.3,25.55 22.4,23.45 22.4,20.3 D5.C 22.4,19.95 22.4,14.4 22.4,9.8 22.75,9.8 25.9,6.65 C3.- 26.25,6.65
  Top 0.305: 32.2,84 33.6,84 35,82.6 51.8,82.6 52.1,82.3 53.4,82.3 55.1,84 60.9,84 | 75.25,82.6 75.25,84.05 76.4,85.2 84.2,85.2 84.2,83.3 | 84.06,81.66 V2.10 84.2,81.54 84.2,83.3 | 84.2,83.3 88,83.3 91.7,79.6 91.7,76.8 94.4,76.8 95,77.4 95,80.1 95.53,80.63 L36.1 98.15,81.9 106.4,81.9 | 106.4,81.9 106.4,81.55 | 106.4,81.9 106.4,83.9 106.8,84.3 121.7,84.3 | 121.8,81.2 121.8,84.2 121.7,84.3 | 121.7,84.3 132.35,84.3 133.7,82.95 | 137.2,82.95 138.8,82.95 138.8,77.3 138.6,77.3 130.6,69.3 139.2,69.3 140.4,70.5 142.9,70.5 145.9,70 145.9,52.8 148.8,47.4 148.7,47.4 148.7,45.7 138,45.7 138,42.6 147,33.6 147,12.9 145.5,11.4 145.5,4.5 145.2,4.2 143.15,4.2 | 93.1,35 97.4,33.8 105.1,33.5 106.2,34.6 106.2,35.3 106.84,34.66 LED7.A 108.08,34.38 | 131.6,23.1 126.4,23.1 125.7,23.8 125.7,28.1 125.6,28.2 124.42,28.2 V1.10 | 108.15,34.65 108.25,34.65 112.6,30.3 112.6,28.93 119.59,21.94 | 115.85,18.2 115.6,18.2 114,16.6 87.9,16.6 86.75,15.45 78.35,15.45 | 80.5,21 78.35,18.85 78.35,15.45 | 78.35,15.45 77.8,14.9 61,14.9 58.8,17.1 58.8,20.1 57.5,21.4 53.67,21.4 53.57,21.3 52.07,22.8 | 21,65.2 21,54.05 20.7,53.75 | 50.15,33.91 46.75,33.95 44.4,33.9 44.3,30.16 44.46,30 41.3,30 38,26.7 36.9,26.7 36.86,26.66 V3.16 36.75,23.45 | 50.15,33.91 52.85,34.65 | 16.1,48.3 15.2,48.3 11.9,50.5 9.5,50.5 9.5,40.59 7.92,39.01 7.92,38.33 9.5,36.75 | 36.75,23.45 36.75,24.5 | L51.2 14.34,32.21 14.28,32.27 | 36.75,23.45 36.8,23.5 36.8,26.7 31.5,26.7 31.4,26.6 31.4,17.4 35.8,13 v35.8,8.5 | 30.8,8.7 v30.4,8.7 28.24,8.7 | L49.1 29.06,9.52 28.24,8.7 | C3.- 28.24,8.7 | SG1.+ 22.58,14.22 22.4,14.4 | V3.10 52.1,24.2 49.9,26.4 49.85,33.61 50.15,33.91
  Bottom 0.305: v35.8,8.5 35.6,8.7 v30.4,8.7
N$117  (via drill 0.9)
  Top 0.254: 14.35,34.3 17.85,30.8 IC2.38 18.2,30.8 22.75,35.35 29.05,35.35 D2.C
  Top 0.305: 14.35,34.3 14.35,36.18 L51.1 | S2.1 11.95,54.49 v15.4,51.09
  Bottom 0.305: v15.4,51.09 14.34,50.03 L51.1
N$118
  Top 0.254: LED1.A 133.7,48.3 133.7,42.35 143.85,32.2 143.85,16.1 140.35,12.6 J1.2
N$119
  Top 0.254: U$7.P$2 145.25,47.6 | 136.85,80.5 IC1.1
  Top 0.305: 136.85,80.5 136.6,80.25 136.6,77.4 128.8,69.6 128.8,68.1 129.07,68.37 S5.3 144.96,68.37 U$7.P$2
N$120  (via drill 0.9)
  Top 0.305: U$4.P$2 56.48,52.32 v56.5,52.3 | v61.7,56.1 v61.7,52.3 | v84.12,63.9 v66.56,63.92
  Top 0.381: v84.93,24.35 87.95,21.33 L8.2
  Bottom 0.305: v61.7,52.3 v56.5,52.3 | v84.12,63.9 84.91,25.31 v84.93,24.35 | v66.56,63.92 v61.7,56.1
N$121  (via drill 0.9)
  Top 0.305: U$4.P$9 51.48,39.92 57,34.4 57.4,34.4 v57.7,34.1
  Bottom 0.305: v57.7,34.1 L6.2
N$122
  Top 0.254: U$10.P$1 107.8,26.6 104.3,26.6 L39.2
N$123
  Top 0.254: L17.2 99.05,21.7 97.65,23.1 95.2,23.1 | 67.2,51.8 U$1.P$4
  Top 0.305: 67.2,51.8 67.4,51.8 70.5,48.7 70.5,46.6 72.5,44.6 74.4,44.6 90.8,28.1 91.39,27.51 91.39,24.36 91.69,24.05 94.77,24.05 95.2,23.62 95.2,23.1
N$124
  Bottom 0.305: U$4.P$7 L5.2
N$127
  Top 0.254: V1.7 122.15,33.6 131.95,43.4 131.95,48.65 133,49.7 133.7,49.7 | 144.55,13.65 141.4,10.5 141.4,8.75 137.55,4.9 100.45,4.9 94.15,11.2 92.4,11.2 L19.1
  Top 0.305: 133.7,49.7 133.8,49.7 135.3,48.2 135.3,41.8 144.5,32.6 144.5,13.7 144.55,13.65
N$128
  Top 0.254: L12.1 113.4,10.85 115.15,10.85 116.9,9.1 123.55,9.1 138.95,24.5 138.95,31.5 137.2,33.25 V1.1
N$129  (via drill 0.9)
  Top 0.305: L12.2 113.06,23.64 112.6,24.1 112.5,24.1 v112.4,24.2 | v111.9,51.4 111,51.4 v107.8,48.2 | U$1.P$1 74.7,48.8 v74.9,48.6
  Bottom 0.305: v112.4,24.2 112.4,50.9 v111.9,51.4 | v74.9,48.6 107.4,48.6 v107.8,48.2
S$3  (via drill 0.9)
  other vias: 37,28.4